# EAGLE board headstage-64-coax-adapter_rev1.2 - panel (EAGLE 9.5.1)
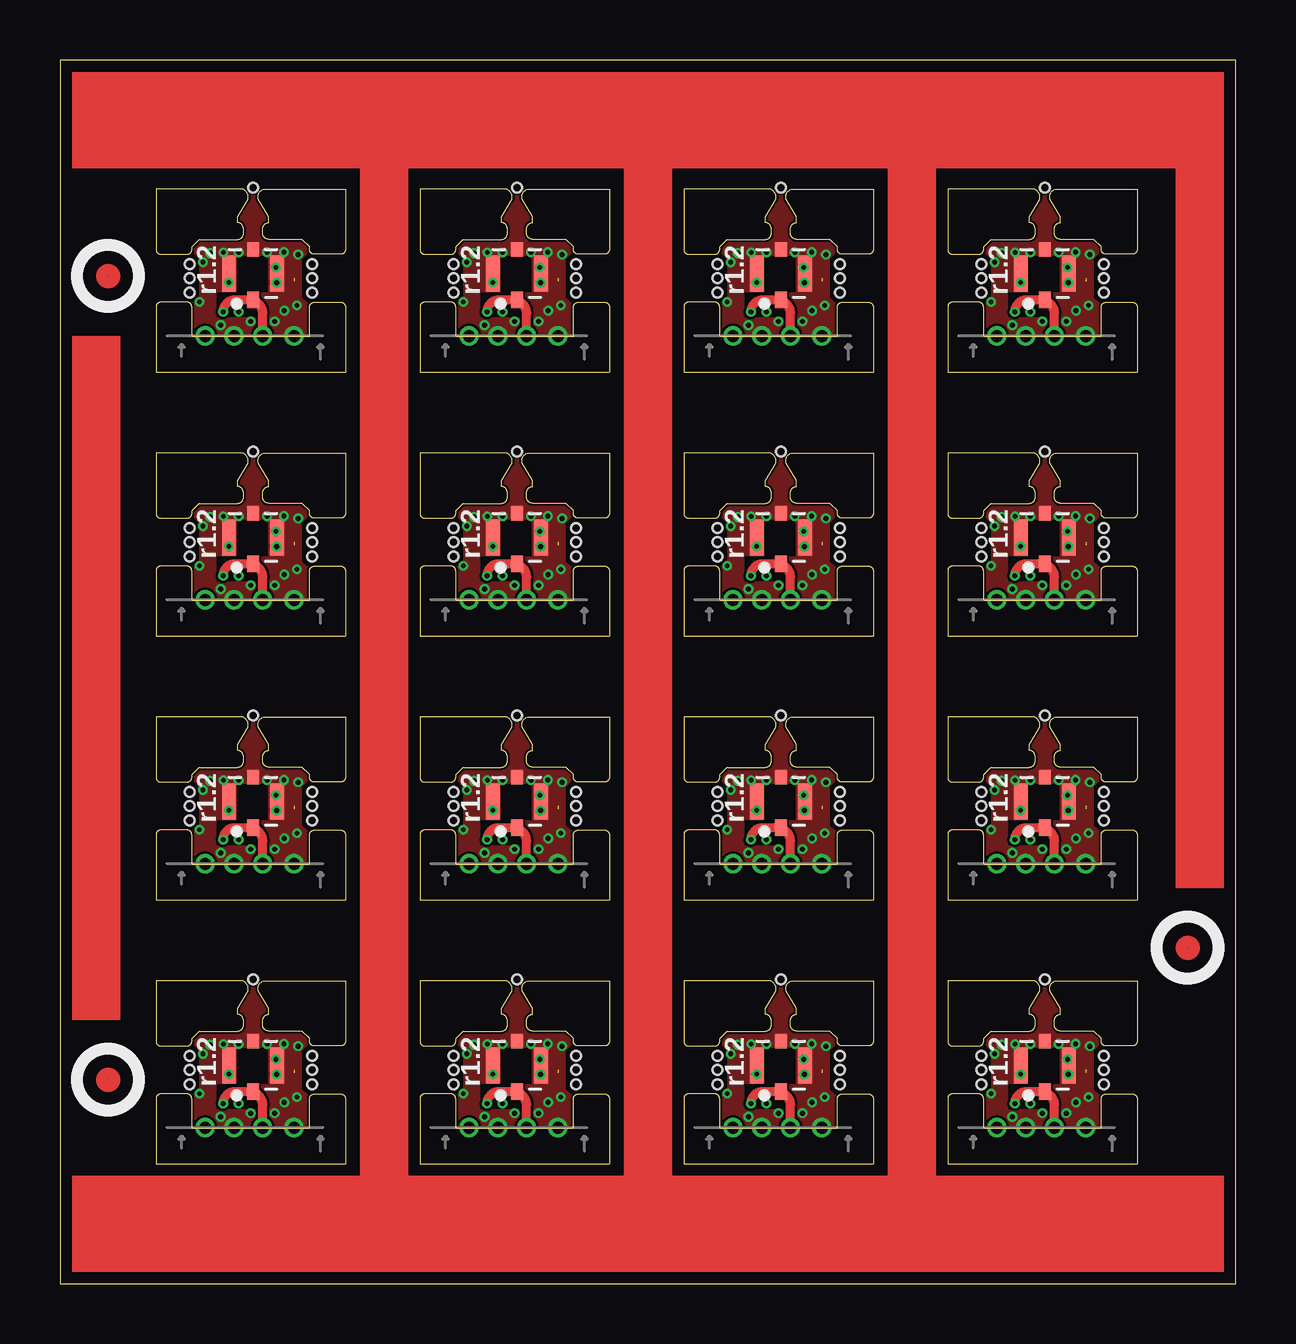
[diagram p0: board, top side]
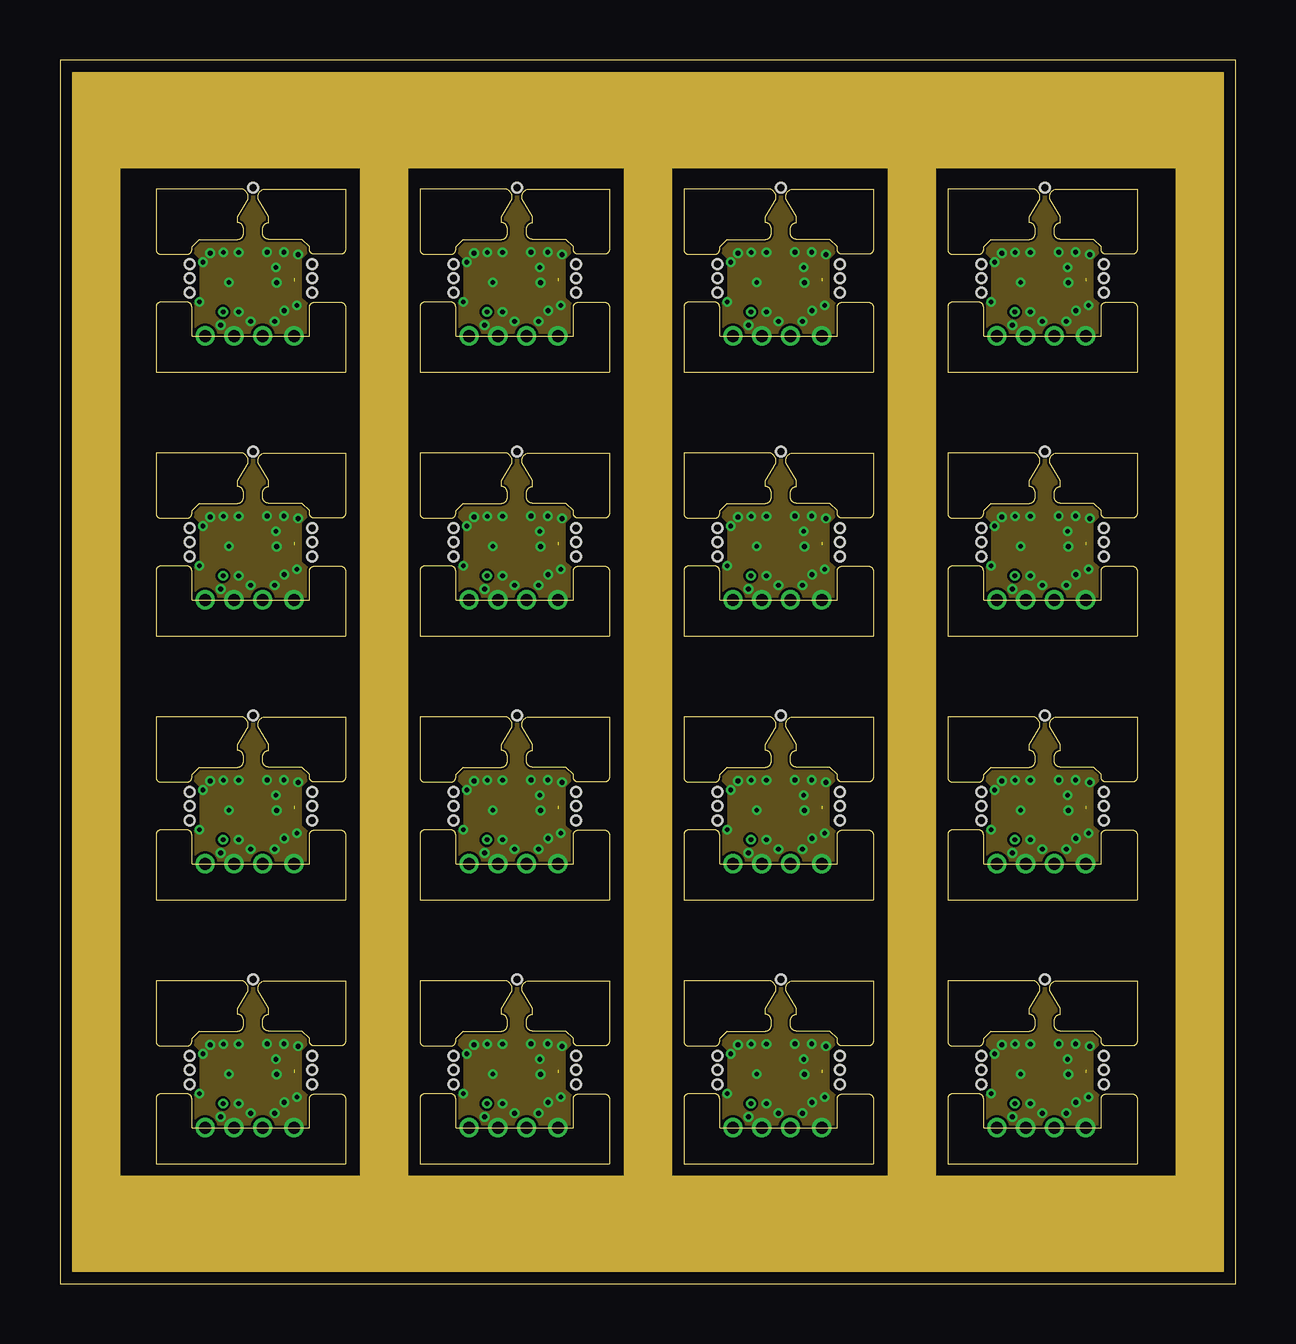
[diagram p1: board, inner layer Route2]
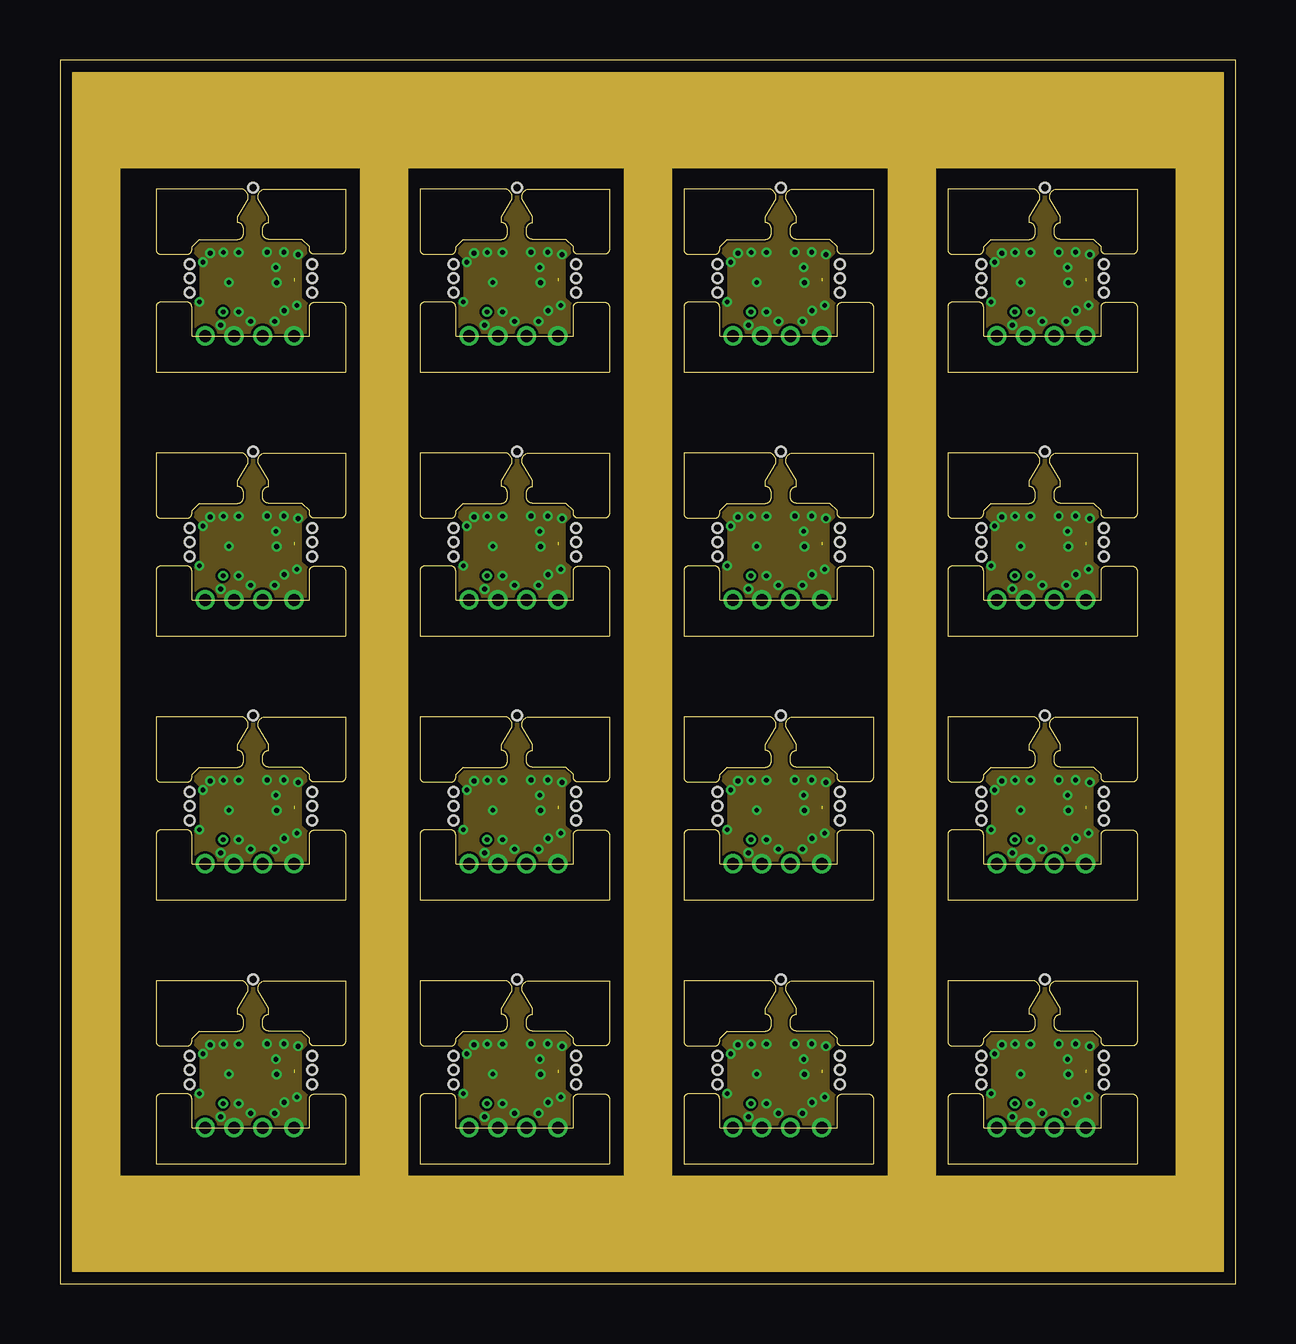
[diagram p2: board, inner layer Route15]
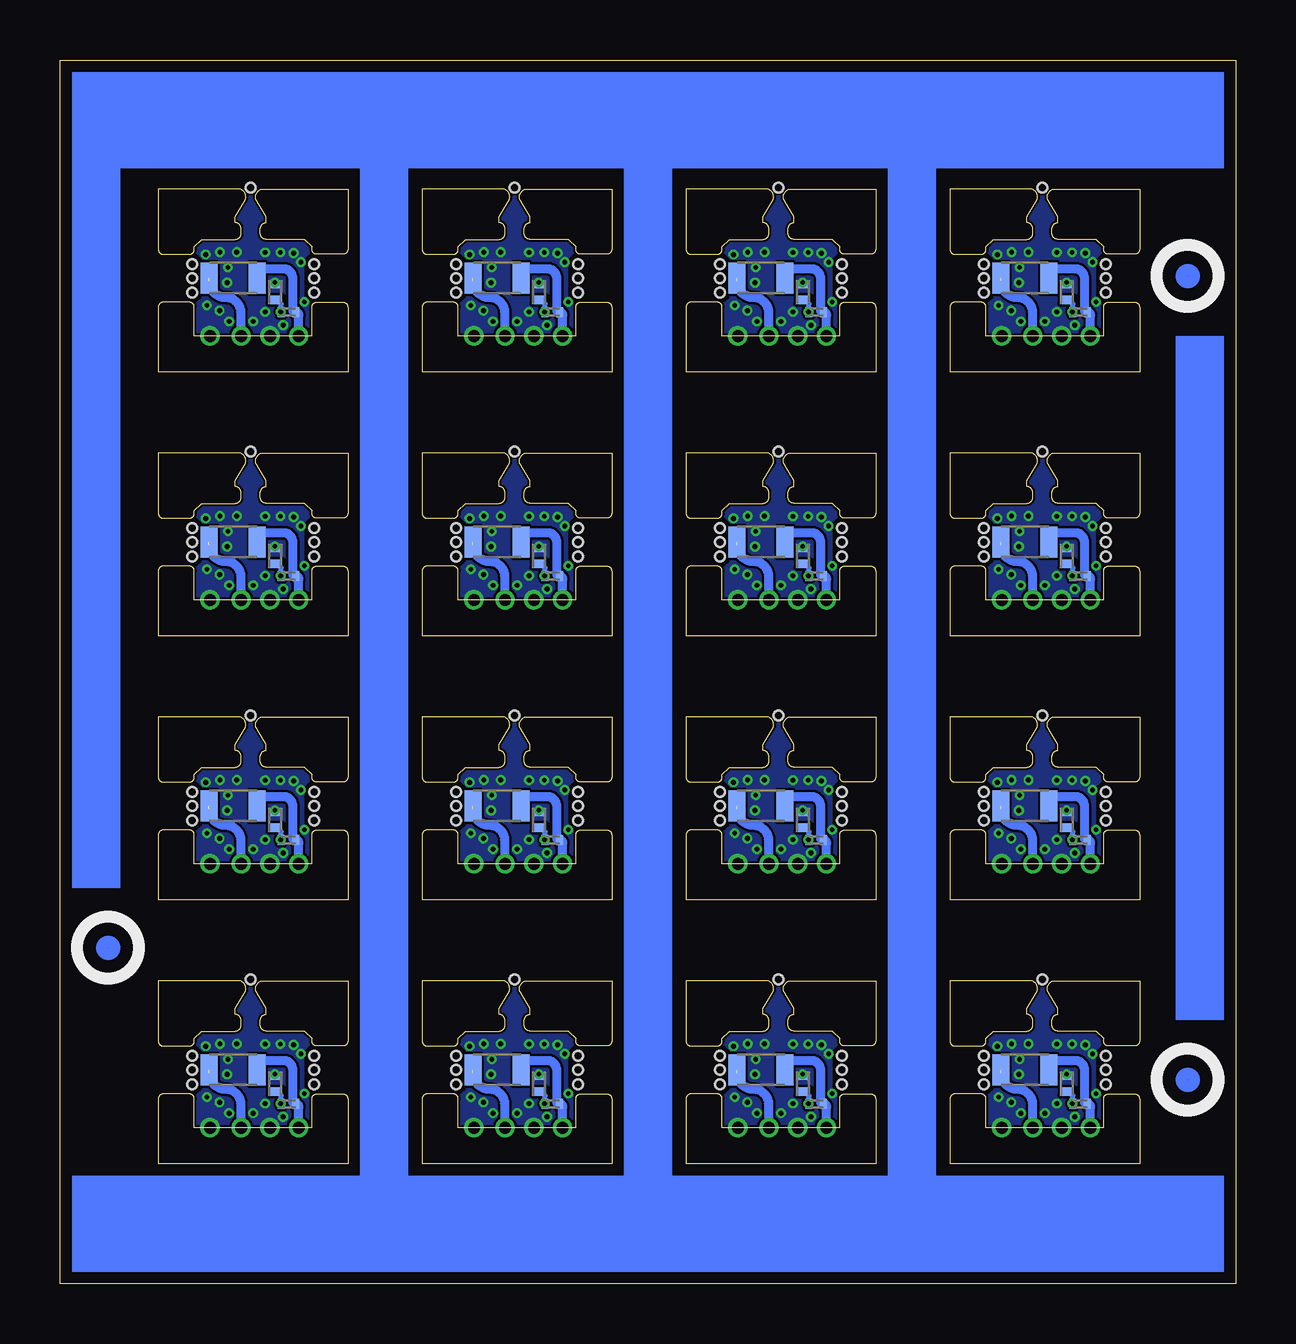
[diagram p3: board, bottom side, seen from below]

Size 49 x 51 mm. Coordinates in mm from the lower left corner, seen from the top.
Outline: 676 segments
Copper layers (1*2*15*16): Top 0.035mm / dielectric 0.2mm / Route2 0.0175mm / dielectric 0.3mm / Route15 0.0175mm / dielectric 0.2mm / Bottom 0.035mm
Design rules "seeed-studio-4-layer *": minimum track width 4mil, minimum drill 0.2mm, track to track 4mil, track to pad 4mil, pad to pad 4mil, via to via 4mil, smd to smd 0mil, copper to edge 0.1mm, drill to drill 10mil, minimum pad ring 6mil, minimum via ring 4mil, stop-mask expansion 4mil, vias tented up to drill 100mil, thermal gap 10mil
Holes 0.4 mm at 8.05,12.68 5.4,9.5 5.4,8.9 5.4,8.3 10.5,9.5 10.5,8.9 10.5,8.3 19.05,12.68 16.4,9.5 16.4,8.9 16.4,8.3 21.5,9.5 21.5,8.9 21.5,8.3 30.05,12.68 27.4,9.5 27.4,8.9 27.4,8.3 32.5,9.5 32.5,8.9 32.5,8.3 41.05,12.68 38.4,9.5 38.4,8.9 38.4,8.3 43.5,9.5 43.5,8.9 43.5,8.3 8.05,23.68 5.4,20.5 5.4,19.9 5.4,19.3 10.5,20.5 10.5,19.9 10.5,19.3 19.05,23.68 16.4,20.5 16.4,19.9 16.4,19.3 21.5,20.5 21.5,19.9 21.5,19.3 30.05,23.68 27.4,20.5 27.4,19.9 27.4,19.3 32.5,20.5 32.5,19.9 32.5,19.3 41.05,23.68 38.4,20.5 38.4,19.9 38.4,19.3 43.5,20.5 43.5,19.9 43.5,19.3 8.05,34.67 5.4,31.5 5.4,30.9 5.4,30.3 10.5,31.5 10.5,30.9 10.5,30.3 19.05,34.67 16.4,31.5 16.4,30.9 16.4,30.3 21.5,31.5 21.5,30.9 21.5,30.3 30.05,34.67 27.4,31.5 27.4,30.9 27.4,30.3 32.5,31.5 32.5,30.9 32.5,30.3 41.05,34.67 38.4,31.5 38.4,30.9 38.4,30.3 43.5,31.5 43.5,30.9 43.5,30.3 8.05,45.67 5.4,42.5 5.4,41.9 5.4,41.3 10.5,42.5 10.5,41.9 10.5,41.3 19.05,45.67 16.4,42.5 16.4,41.9 16.4,41.3 21.5,42.5 21.5,41.9 21.5,41.3 30.05,45.67 27.4,42.5 27.4,41.9 27.4,41.3 32.5,42.5 32.5,41.9 32.5,41.3 41.05,45.67 38.4,42.5 38.4,41.9 38.4,41.3 43.5,42.5 43.5,41.9 43.5,41.3

## Footprints (pad centres in the part's own frame; a part is rotated, then mirrored left to right if it is on the bottom)
0402T-DFN = smd 0.35 x 0.6: A -0.325,0; C 0.325,0
X_FL_R_SMT_1(02) = smd 0.5 x 0.7: P$1 0,-1.1 | smd 0.6 x 1.5: P$2 -1,0; P$4 1,0 | smd 0.5 x 0.6: P$3 0,1
HEADSTAGE64-DAUGHER-CARD-CASTELLATED = drill 0.5: 1 -2.4,0; 2 -1.2,0; 3 0,0; 4 1.3,0
0805T = smd 0.7 x 1.3: 1 -1,0; 2 1,0
0201T = smd 0.3 x 0.4: 1 -0.3,0; 2 0.3,0

## Placement (x,y rotation side)
D1  SESD0402X1UN-0020-090  [0402T-DFN]  7.03,8.33 270 bottom
D2  SESD0402X1UN-0020-090  [0402T-DFN]  18.03,8.33 270 bottom
D3  SESD0402X1UN-0020-090  [0402T-DFN]  29.03,8.33 270 bottom
D4  SESD0402X1UN-0020-090  [0402T-DFN]  40.03,8.33 270 bottom
D5  SESD0402X1UN-0020-090  [0402T-DFN]  7.03,19.33 270 bottom
D6  SESD0402X1UN-0020-090  [0402T-DFN]  18.03,19.33 270 bottom
D7  SESD0402X1UN-0020-090  [0402T-DFN]  29.03,19.33 270 bottom
D8  SESD0402X1UN-0020-090  [0402T-DFN]  40.03,19.33 270 bottom
D9  SESD0402X1UN-0020-090  [0402T-DFN]  7.03,30.33 270 bottom
D10  SESD0402X1UN-0020-090  [0402T-DFN]  18.03,30.33 270 bottom
D11  SESD0402X1UN-0020-090  [0402T-DFN]  29.03,30.33 270 bottom
D12  SESD0402X1UN-0020-090  [0402T-DFN]  40.03,30.33 270 bottom
D13  SESD0402X1UN-0020-090  [0402T-DFN]  7.03,41.33 270 bottom
D14  SESD0402X1UN-0020-090  [0402T-DFN]  18.03,41.33 270 bottom
D15  SESD0402X1UN-0020-090  [0402T-DFN]  29.03,41.33 270 bottom
D16  SESD0402X1UN-0020-090  [0402T-DFN]  40.03,41.33 270 bottom
E$1  [FIDUCIAL]  47,14 0 top
E$2  [FIDUCIAL]  2,42 0 top
E$3  [FIDUCIAL]  2,42 0 bottom
E$4  [FIDUCIAL]  2,8.5 0 top
E$5  [FIDUCIAL]  2,8.5 0 bottom
E$6  [FIDUCIAL]  47,14 0 bottom
J1  X.FL-R-SMT-1(02)  [X_FL_R_SMT_1(02)]  8.05,9.1 0 top
J2  [HEADSTAGE64-DAUGHER-CARD-CASTELLATED]  8.45,6.5 0 top
J3  X.FL-R-SMT-1(02)  [X_FL_R_SMT_1(02)]  19.05,9.1 0 top
J4  [HEADSTAGE64-DAUGHER-CARD-CASTELLATED]  19.45,6.5 0 top
J5  X.FL-R-SMT-1(02)  [X_FL_R_SMT_1(02)]  30.05,9.1 0 top
J6  [HEADSTAGE64-DAUGHER-CARD-CASTELLATED]  30.45,6.5 0 top
J7  X.FL-R-SMT-1(02)  [X_FL_R_SMT_1(02)]  41.05,9.1 0 top
J8  [HEADSTAGE64-DAUGHER-CARD-CASTELLATED]  41.45,6.5 0 top
J9  X.FL-R-SMT-1(02)  [X_FL_R_SMT_1(02)]  8.05,20.1 0 top
J10  [HEADSTAGE64-DAUGHER-CARD-CASTELLATED]  8.45,17.5 0 top
J11  X.FL-R-SMT-1(02)  [X_FL_R_SMT_1(02)]  19.05,20.1 0 top
J12  [HEADSTAGE64-DAUGHER-CARD-CASTELLATED]  19.45,17.5 0 top
J13  X.FL-R-SMT-1(02)  [X_FL_R_SMT_1(02)]  30.05,20.1 0 top
J14  [HEADSTAGE64-DAUGHER-CARD-CASTELLATED]  30.45,17.5 0 top
J15  X.FL-R-SMT-1(02)  [X_FL_R_SMT_1(02)]  41.05,20.1 0 top
J16  [HEADSTAGE64-DAUGHER-CARD-CASTELLATED]  41.45,17.5 0 top
J17  X.FL-R-SMT-1(02)  [X_FL_R_SMT_1(02)]  8.05,31.1 0 top
J18  [HEADSTAGE64-DAUGHER-CARD-CASTELLATED]  8.45,28.5 0 top
J19  X.FL-R-SMT-1(02)  [X_FL_R_SMT_1(02)]  19.05,31.1 0 top
J20  [HEADSTAGE64-DAUGHER-CARD-CASTELLATED]  19.45,28.5 0 top
J21  X.FL-R-SMT-1(02)  [X_FL_R_SMT_1(02)]  30.05,31.1 0 top
J22  [HEADSTAGE64-DAUGHER-CARD-CASTELLATED]  30.45,28.5 0 top
J23  X.FL-R-SMT-1(02)  [X_FL_R_SMT_1(02)]  41.05,31.1 0 top
J24  [HEADSTAGE64-DAUGHER-CARD-CASTELLATED]  41.45,28.5 0 top
J25  X.FL-R-SMT-1(02)  [X_FL_R_SMT_1(02)]  8.05,42.1 0 top
J26  [HEADSTAGE64-DAUGHER-CARD-CASTELLATED]  8.45,39.5 0 top
J27  X.FL-R-SMT-1(02)  [X_FL_R_SMT_1(02)]  19.05,42.1 0 top
J28  [HEADSTAGE64-DAUGHER-CARD-CASTELLATED]  19.45,39.5 0 top
J29  X.FL-R-SMT-1(02)  [X_FL_R_SMT_1(02)]  30.05,42.1 0 top
J30  [HEADSTAGE64-DAUGHER-CARD-CASTELLATED]  30.45,39.5 0 top
J31  X.FL-R-SMT-1(02)  [X_FL_R_SMT_1(02)]  41.05,42.1 0 top
J32  [HEADSTAGE64-DAUGHER-CARD-CASTELLATED]  41.45,39.5 0 top
L1  CIG21L4R7MNE  [0805T]  8.78,8.91 0 bottom
L2  CIG21L4R7MNE  [0805T]  19.78,8.91 0 bottom
L3  CIG21L4R7MNE  [0805T]  30.78,8.91 0 bottom
L4  CIG21L4R7MNE  [0805T]  41.78,8.91 0 bottom
L5  CIG21L4R7MNE  [0805T]  8.78,19.91 0 bottom
L6  CIG21L4R7MNE  [0805T]  19.78,19.91 0 bottom
L7  CIG21L4R7MNE  [0805T]  30.78,19.91 0 bottom
L8  CIG21L4R7MNE  [0805T]  41.78,19.91 0 bottom
L9  CIG21L4R7MNE  [0805T]  8.78,30.91 0 bottom
L10  CIG21L4R7MNE  [0805T]  19.78,30.91 0 bottom
L11  CIG21L4R7MNE  [0805T]  30.78,30.91 0 bottom
L12  CIG21L4R7MNE  [0805T]  41.78,30.91 0 bottom
L13  CIG21L4R7MNE  [0805T]  8.78,41.91 0 bottom
L14  CIG21L4R7MNE  [0805T]  19.78,41.91 0 bottom
L15  CIG21L4R7MNE  [0805T]  30.78,41.91 0 bottom
L16  CIG21L4R7MNE  [0805T]  41.78,41.91 0 bottom
R1  1k  [0201T]  17.48,7.49 0 bottom
R2  1k  [0201T]  28.48,7.49 0 bottom
R3  1k  [0201T]  6.48,7.49 0 bottom
R4  1k  [0201T]  39.48,7.49 0 bottom
R5  1k  [0201T]  6.48,18.49 0 bottom
R6  1k  [0201T]  17.48,18.49 0 bottom
R7  1k  [0201T]  28.48,18.49 0 bottom
R8  1k  [0201T]  39.48,18.49 0 bottom
R9  1k  [0201T]  6.48,29.49 0 bottom
R10  1k  [0201T]  17.48,29.49 0 bottom
R11  1k  [0201T]  28.48,29.49 0 bottom
R12  1k  [0201T]  39.48,29.49 0 bottom
R13  1k  [0201T]  6.48,40.49 0 bottom
R14  1k  [0201T]  17.48,40.49 0 bottom
R15  1k  [0201T]  28.48,40.49 0 bottom
R16  1k  [0201T]  39.48,40.49 0 bottom

## Library data of the parts
D1-D16 J1-J32 L1-L16 R1-R16 = jonnew
E$1-E$6 = fiducial

## Nets
_SIGOUT1: D1.C J1.P$1 J2.3 L1.1 R3.1
_SIGOUT2: D2.C J3.P$1 J4.3 L2.1 R1.1
_SIGOUT3: D3.C J5.P$1 J6.3 L3.1 R2.1
_SIGOUT4: D4.C J7.P$1 J8.3 L4.1 R4.1
_SIGOUT5: D5.C J9.P$1 J10.3 L5.1 R5.1
_SIGOUT6: D6.C J11.P$1 J12.3 L6.1 R6.1
_SIGOUT7: D7.C J13.P$1 J14.3 L7.1 R7.1
_SIGOUT8: D8.C J15.P$1 J16.3 L8.1 R8.1
_SIGOUT9: D9.C J17.P$1 J18.3 L9.1 R9.1
_SIGOUT10: D10.C J19.P$1 J20.3 L10.1 R10.1
_SIGOUT11: D11.C J21.P$1 J22.3 L11.1 R11.1
_SIGOUT12: D12.C J23.P$1 J24.3 L12.1 R12.1
_SIGOUT13: D13.C J25.P$1 J26.3 L13.1 R13.1
_SIGOUT14: D14.C J27.P$1 J28.3 L14.1 R14.1
_SIGOUT15: D15.C J29.P$1 J30.3 L15.1 R15.1
_SIGOUT16: D16.C J31.P$1 J32.3 L16.1 R16.1
GND: D1.A J1.P$2 J1.P$3 J1.P$4 J2.2 J2.4
GND2: D2.A J3.P$2 J3.P$3 J3.P$4 J4.2 J4.4
GND10: D3.A J5.P$2 J5.P$3 J5.P$4 J6.2 J6.4
GND12: D4.A J7.P$2 J7.P$3 J7.P$4 J8.2 J8.4
GND14: D5.A J9.P$2 J9.P$3 J9.P$4 J10.2 J10.4
GND16: D6.A J11.P$2 J11.P$3 J11.P$4 J12.2 J12.4
GND18: D7.A J13.P$2 J13.P$3 J13.P$4 J14.2 J14.4
GND20: D8.A J15.P$2 J15.P$3 J15.P$4 J16.2 J16.4
GND22: D9.A J17.P$2 J17.P$3 J17.P$4 J18.2 J18.4
GND24: D10.A J19.P$2 J19.P$3 J19.P$4 J20.2 J20.4
GND26: D11.A J21.P$2 J21.P$3 J21.P$4 J22.2 J22.4
GND28: D12.A J23.P$2 J23.P$3 J23.P$4 J24.2 J24.4
GND30: D13.A J25.P$2 J25.P$3 J25.P$4 J26.2 J26.4
GND32: D14.A J27.P$2 J27.P$3 J27.P$4 J28.2 J28.4
GND34: D15.A J29.P$2 J29.P$3 J29.P$4 J30.2 J30.4
GND36: D16.A J31.P$2 J31.P$3 J31.P$4 J32.2 J32.4
N$1: J4.1 L2.2 R1.2
N$3: J6.1 L3.2 R2.2
N$5: J8.1 L4.2 R4.2
N$7: J10.1 L5.2 R5.2
N$9: J12.1 L6.2 R6.2
N$11: J14.1 L7.2 R7.2
N$13: J16.1 L8.2 R8.2
N$15: J18.1 L9.2 R9.2
N$17: J20.1 L10.2 R10.2
N$19: J22.1 L11.2 R11.2
N$21: J24.1 L12.2 R12.2
N$23: J26.1 L13.2 R13.2
N$25: J28.1 L14.2 R14.2
N$27: J30.1 L15.2 R15.2
N$29: J32.1 L16.2 R16.2
N$48: J2.1 L1.2 R3.2

## Tracks (layer width: path | path; a pad name or v marks a point on that pad's centre or on a via)
_SIGOUT1  (via drill 0.2)  (1 unrouted)
  Top 0.37: J2.3 8.45,7.45 arc90 7.9,8 J1.P$1 7.3,8 arc90 v6.8,7.5
  Bottom 0.127: R3.1 R3.1 arc90 v6.8,7.5
  Bottom 0.2: R3.1 6.78,7.83 D1.C
  Bottom 0.37: J2.3 8.45,7.45 arc-90 9.1,8.1 arc90 9.78,8.78
_SIGOUT2  (via drill 0.2)  (1 unrouted)
  Top 0.37: J4.3 19.45,7.45 arc90 18.9,8 J3.P$1 18.3,8 arc90 v17.8,7.5
  Bottom 0.127: R1.1 R1.1 arc90 v17.8,7.5
  Bottom 0.2: R1.1 17.78,7.83 D2.C
  Bottom 0.37: J4.3 19.45,7.45 arc-90 20.1,8.1 arc90 20.78,8.78
_SIGOUT3  (via drill 0.2)  (1 unrouted)
  Top 0.37: J6.3 30.45,7.45 arc90 29.9,8 J5.P$1 29.3,8 arc90 v28.8,7.5
  Bottom 0.127: R2.1 R2.1 arc90 v28.8,7.5
  Bottom 0.2: R2.1 28.78,7.83 D3.C
  Bottom 0.37: J6.3 30.45,7.45 arc-90 31.1,8.1 arc90 31.78,8.78
_SIGOUT4  (via drill 0.2)  (1 unrouted)
  Top 0.37: J8.3 41.45,7.45 arc90 40.9,8 J7.P$1 40.3,8 arc90 v39.8,7.5
  Bottom 0.127: R4.1 R4.1 arc90 v39.8,7.5
  Bottom 0.2: R4.1 39.78,7.83 D4.C
  Bottom 0.37: J8.3 41.45,7.45 arc-90 42.1,8.1 arc90 42.78,8.78
_SIGOUT5  (via drill 0.2)  (1 unrouted)
  Top 0.37: J10.3 8.45,18.45 arc90 7.9,19 J9.P$1 7.3,19 arc90 v6.8,18.5
  Bottom 0.127: R5.1 R5.1 arc90 v6.8,18.5
  Bottom 0.2: R5.1 6.78,18.84 D5.C
  Bottom 0.37: J10.3 8.45,18.45 arc-90 9.1,19.1 arc90 9.78,19.78
_SIGOUT6  (via drill 0.2)  (1 unrouted)
  Top 0.37: J12.3 19.45,18.45 arc90 18.9,19 J11.P$1 18.3,19 arc90 v17.8,18.5
  Bottom 0.127: R6.1 R6.1 arc90 v17.8,18.5
  Bottom 0.2: R6.1 17.78,18.84 D6.C
  Bottom 0.37: J12.3 19.45,18.45 arc-90 20.1,19.1 arc90 20.78,19.78
_SIGOUT7  (via drill 0.2)  (1 unrouted)
  Top 0.37: J14.3 30.45,18.45 arc90 29.9,19 J13.P$1 29.3,19 arc90 v28.8,18.5
  Bottom 0.127: R7.1 R7.1 arc90 v28.8,18.5
  Bottom 0.2: R7.1 28.78,18.84 D7.C
  Bottom 0.37: J14.3 30.45,18.45 arc-90 31.1,19.1 arc90 31.78,19.78
_SIGOUT8  (via drill 0.2)  (1 unrouted)
  Top 0.37: J16.3 41.45,18.45 arc90 40.9,19 J15.P$1 40.3,19 arc90 v39.8,18.5
  Bottom 0.127: R8.1 R8.1 arc90 v39.8,18.5
  Bottom 0.2: R8.1 39.78,18.84 D8.C
  Bottom 0.37: J16.3 41.45,18.45 arc-90 42.1,19.1 arc90 42.78,19.78
_SIGOUT9  (via drill 0.2)  (1 unrouted)
  Top 0.37: J18.3 8.45,29.45 arc90 7.9,30 J17.P$1 7.3,30 arc90 v6.8,29.5
  Bottom 0.127: R9.1 R9.1 arc90 v6.8,29.5
  Bottom 0.2: R9.1 6.78,29.84 D9.C
  Bottom 0.37: J18.3 8.45,29.45 arc-90 9.1,30.1 arc90 9.78,30.78
_SIGOUT10  (via drill 0.2)  (1 unrouted)
  Top 0.37: J20.3 19.45,29.45 arc90 18.9,30 J19.P$1 18.3,30 arc90 v17.8,29.5
  Bottom 0.127: R10.1 R10.1 arc90 v17.8,29.5
  Bottom 0.2: R10.1 17.78,29.84 D10.C
  Bottom 0.37: J20.3 19.45,29.45 arc-90 20.1,30.1 arc90 20.78,30.78
_SIGOUT11  (via drill 0.2)  (1 unrouted)
  Top 0.37: J22.3 30.45,29.45 arc90 29.9,30 J21.P$1 29.3,30 arc90 v28.8,29.5
  Bottom 0.127: R11.1 R11.1 arc90 v28.8,29.5
  Bottom 0.2: R11.1 28.78,29.84 D11.C
  Bottom 0.37: J22.3 30.45,29.45 arc-90 31.1,30.1 arc90 31.78,30.78
_SIGOUT12  (via drill 0.2)  (1 unrouted)
  Top 0.37: J24.3 41.45,29.45 arc90 40.9,30 J23.P$1 40.3,30 arc90 v39.8,29.5
  Bottom 0.127: R12.1 R12.1 arc90 v39.8,29.5
  Bottom 0.2: R12.1 39.78,29.84 D12.C
  Bottom 0.37: J24.3 41.45,29.45 arc-90 42.1,30.1 arc90 42.78,30.78
_SIGOUT13  (via drill 0.2)  (1 unrouted)
  Top 0.37: J26.3 8.45,40.45 arc90 7.9,41 J25.P$1 7.3,41 arc90 v6.8,40.5
  Bottom 0.127: R13.1 R13.1 arc90 v6.8,40.5
  Bottom 0.2: R13.1 6.78,40.84 D13.C
  Bottom 0.37: J26.3 8.45,40.45 arc-90 9.1,41.1 arc90 9.78,41.78
_SIGOUT14  (via drill 0.2)  (1 unrouted)
  Top 0.37: J28.3 19.45,40.45 arc90 18.9,41 J27.P$1 18.3,41 arc90 v17.8,40.5
  Bottom 0.127: R14.1 R14.1 arc90 v17.8,40.5
  Bottom 0.2: R14.1 17.78,40.84 D14.C
  Bottom 0.37: J28.3 19.45,40.45 arc-90 20.1,41.1 arc90 20.78,41.78
_SIGOUT15  (via drill 0.2)  (1 unrouted)
  Top 0.37: J30.3 30.45,40.45 arc90 29.9,41 J29.P$1 29.3,41 arc90 v28.8,40.5
  Bottom 0.127: R15.1 R15.1 arc90 v28.8,40.5
  Bottom 0.2: R15.1 28.78,40.84 D15.C
  Bottom 0.37: J30.3 30.45,40.45 arc-90 31.1,41.1 arc90 31.78,41.78
_SIGOUT16  (via drill 0.2)  (1 unrouted)
  Top 0.37: J32.3 41.45,40.45 arc90 40.9,41 J31.P$1 40.3,41 arc90 v39.8,40.5
  Bottom 0.127: R16.1 R16.1 arc90 v39.8,40.5
  Bottom 0.2: R16.1 39.78,40.84 D16.C
  Bottom 0.37: J32.3 41.45,40.45 arc-90 42.1,41.1 arc90 42.78,41.78
C1
  cutout Top: 5.6,9.9 5.8,9.7 5.8,8.1 5.6,7.9 5.3,7.9 5.3,9.9
  cutout Route2: 5.6,9.9 5.8,9.7 5.8,8.1 5.6,7.9 5.3,7.9 5.3,9.9
  cutout Route15: 5.6,9.9 5.8,9.7 5.8,8.1 5.6,7.9 5.3,7.9 5.3,9.9
  cutout Bottom: 5.6,9.9 5.8,9.7 5.8,8.1 5.6,7.9 5.3,7.9 5.3,9.9
C2
  cutout Route2: 10.3,9.9 10.1,9.7 10.1,8.1 10.3,7.9 10.6,7.9 10.6,9.9
C3
  cutout Route15: 10.3,9.9 10.1,9.7 10.1,8.1 10.3,7.9 10.6,7.9 10.6,9.9
C4
  cutout Bottom: 10.3,9.9 10.1,9.7 10.1,8.1 10.3,7.9 10.6,7.9 10.6,9.9
C5
  cutout Top: 10.3,9.9 10.1,9.7 10.1,8.1 10.3,7.9 10.6,7.9 10.6,9.9
C6
  cutout Top: 16.6,9.9 16.8,9.7 16.8,8.1 16.6,7.9 16.3,7.9 16.3,9.9
  cutout Route2: 16.6,9.9 16.8,9.7 16.8,8.1 16.6,7.9 16.3,7.9 16.3,9.9
  cutout Route15: 16.6,9.9 16.8,9.7 16.8,8.1 16.6,7.9 16.3,7.9 16.3,9.9
  cutout Bottom: 16.6,9.9 16.8,9.7 16.8,8.1 16.6,7.9 16.3,7.9 16.3,9.9
C7
  cutout Route2: 21.3,9.9 21.1,9.7 21.1,8.1 21.3,7.9 21.6,7.9 21.6,9.9
C8
  cutout Route15: 21.3,9.9 21.1,9.7 21.1,8.1 21.3,7.9 21.6,7.9 21.6,9.9
C9
  cutout Bottom: 21.3,9.9 21.1,9.7 21.1,8.1 21.3,7.9 21.6,7.9 21.6,9.9
C10
  cutout Top: 21.3,9.9 21.1,9.7 21.1,8.1 21.3,7.9 21.6,7.9 21.6,9.9
C11
  cutout Top: 27.6,9.9 27.8,9.7 27.8,8.1 27.6,7.9 27.3,7.9 27.3,9.9
  cutout Route2: 27.6,9.9 27.8,9.7 27.8,8.1 27.6,7.9 27.3,7.9 27.3,9.9
  cutout Route15: 27.6,9.9 27.8,9.7 27.8,8.1 27.6,7.9 27.3,7.9 27.3,9.9
  cutout Bottom: 27.6,9.9 27.8,9.7 27.8,8.1 27.6,7.9 27.3,7.9 27.3,9.9
C12
  cutout Route2: 32.3,9.9 32.1,9.7 32.1,8.1 32.3,7.9 32.6,7.9 32.6,9.9
C13
  cutout Route15: 32.3,9.9 32.1,9.7 32.1,8.1 32.3,7.9 32.6,7.9 32.6,9.9
C14
  cutout Bottom: 32.3,9.9 32.1,9.7 32.1,8.1 32.3,7.9 32.6,7.9 32.6,9.9
C15
  cutout Top: 32.3,9.9 32.1,9.7 32.1,8.1 32.3,7.9 32.6,7.9 32.6,9.9
C16
  cutout Top: 38.6,9.9 38.8,9.7 38.8,8.1 38.6,7.9 38.3,7.9 38.3,9.9
  cutout Route2: 38.6,9.9 38.8,9.7 38.8,8.1 38.6,7.9 38.3,7.9 38.3,9.9
  cutout Route15: 38.6,9.9 38.8,9.7 38.8,8.1 38.6,7.9 38.3,7.9 38.3,9.9
  cutout Bottom: 38.6,9.9 38.8,9.7 38.8,8.1 38.6,7.9 38.3,7.9 38.3,9.9
C17
  cutout Route2: 43.3,9.9 43.1,9.7 43.1,8.1 43.3,7.9 43.6,7.9 43.6,9.9
C18
  cutout Route15: 43.3,9.9 43.1,9.7 43.1,8.1 43.3,7.9 43.6,7.9 43.6,9.9
C19
  cutout Bottom: 43.3,9.9 43.1,9.7 43.1,8.1 43.3,7.9 43.6,7.9 43.6,9.9
C20
  cutout Top: 43.3,9.9 43.1,9.7 43.1,8.1 43.3,7.9 43.6,7.9 43.6,9.9
C21
  cutout Top: 5.6,20.9 5.8,20.7 5.8,19.1 5.6,18.9 5.3,18.9 5.3,20.9
  cutout Route2: 5.6,20.9 5.8,20.7 5.8,19.1 5.6,18.9 5.3,18.9 5.3,20.9
  cutout Route15: 5.6,20.9 5.8,20.7 5.8,19.1 5.6,18.9 5.3,18.9 5.3,20.9
  cutout Bottom: 5.6,20.9 5.8,20.7 5.8,19.1 5.6,18.9 5.3,18.9 5.3,20.9
C22
  cutout Route2: 10.3,20.9 10.1,20.7 10.1,19.1 10.3,18.9 10.6,18.9 10.6,20.9
C23
  cutout Route15: 10.3,20.9 10.1,20.7 10.1,19.1 10.3,18.9 10.6,18.9 10.6,20.9
C24
  cutout Bottom: 10.3,20.9 10.1,20.7 10.1,19.1 10.3,18.9 10.6,18.9 10.6,20.9
C25
  cutout Top: 10.3,20.9 10.1,20.7 10.1,19.1 10.3,18.9 10.6,18.9 10.6,20.9
C26
  cutout Top: 16.6,20.9 16.8,20.7 16.8,19.1 16.6,18.9 16.3,18.9 16.3,20.9
  cutout Route2: 16.6,20.9 16.8,20.7 16.8,19.1 16.6,18.9 16.3,18.9 16.3,20.9
  cutout Route15: 16.6,20.9 16.8,20.7 16.8,19.1 16.6,18.9 16.3,18.9 16.3,20.9
  cutout Bottom: 16.6,20.9 16.8,20.7 16.8,19.1 16.6,18.9 16.3,18.9 16.3,20.9
C27
  cutout Route2: 21.3,20.9 21.1,20.7 21.1,19.1 21.3,18.9 21.6,18.9 21.6,20.9
C28
  cutout Route15: 21.3,20.9 21.1,20.7 21.1,19.1 21.3,18.9 21.6,18.9 21.6,20.9
C29
  cutout Bottom: 21.3,20.9 21.1,20.7 21.1,19.1 21.3,18.9 21.6,18.9 21.6,20.9
C30
  cutout Top: 21.3,20.9 21.1,20.7 21.1,19.1 21.3,18.9 21.6,18.9 21.6,20.9
C31
  cutout Top: 27.6,20.9 27.8,20.7 27.8,19.1 27.6,18.9 27.3,18.9 27.3,20.9
  cutout Route2: 27.6,20.9 27.8,20.7 27.8,19.1 27.6,18.9 27.3,18.9 27.3,20.9
  cutout Route15: 27.6,20.9 27.8,20.7 27.8,19.1 27.6,18.9 27.3,18.9 27.3,20.9
  cutout Bottom: 27.6,20.9 27.8,20.7 27.8,19.1 27.6,18.9 27.3,18.9 27.3,20.9
C32
  cutout Route2: 32.3,20.9 32.1,20.7 32.1,19.1 32.3,18.9 32.6,18.9 32.6,20.9
C33
  cutout Route15: 32.3,20.9 32.1,20.7 32.1,19.1 32.3,18.9 32.6,18.9 32.6,20.9
C34
  cutout Bottom: 32.3,20.9 32.1,20.7 32.1,19.1 32.3,18.9 32.6,18.9 32.6,20.9
C35
  cutout Top: 32.3,20.9 32.1,20.7 32.1,19.1 32.3,18.9 32.6,18.9 32.6,20.9
C36
  cutout Top: 38.6,20.9 38.8,20.7 38.8,19.1 38.6,18.9 38.3,18.9 38.3,20.9
  cutout Route2: 38.6,20.9 38.8,20.7 38.8,19.1 38.6,18.9 38.3,18.9 38.3,20.9
  cutout Route15: 38.6,20.9 38.8,20.7 38.8,19.1 38.6,18.9 38.3,18.9 38.3,20.9
  cutout Bottom: 38.6,20.9 38.8,20.7 38.8,19.1 38.6,18.9 38.3,18.9 38.3,20.9
C37
  cutout Route2: 43.3,20.9 43.1,20.7 43.1,19.1 43.3,18.9 43.6,18.9 43.6,20.9
C38
  cutout Route15: 43.3,20.9 43.1,20.7 43.1,19.1 43.3,18.9 43.6,18.9 43.6,20.9
C39
  cutout Bottom: 43.3,20.9 43.1,20.7 43.1,19.1 43.3,18.9 43.6,18.9 43.6,20.9
C40
  cutout Top: 43.3,20.9 43.1,20.7 43.1,19.1 43.3,18.9 43.6,18.9 43.6,20.9
C41
  cutout Top: 5.6,31.9 5.8,31.7 5.8,30.1 5.6,29.9 5.3,29.9 5.3,31.9
  cutout Route2: 5.6,31.9 5.8,31.7 5.8,30.1 5.6,29.9 5.3,29.9 5.3,31.9
  cutout Route15: 5.6,31.9 5.8,31.7 5.8,30.1 5.6,29.9 5.3,29.9 5.3,31.9
  cutout Bottom: 5.6,31.9 5.8,31.7 5.8,30.1 5.6,29.9 5.3,29.9 5.3,31.9
C42
  cutout Route2: 10.3,31.9 10.1,31.7 10.1,30.1 10.3,29.9 10.6,29.9 10.6,31.9
C43
  cutout Route15: 10.3,31.9 10.1,31.7 10.1,30.1 10.3,29.9 10.6,29.9 10.6,31.9
C44
  cutout Bottom: 10.3,31.9 10.1,31.7 10.1,30.1 10.3,29.9 10.6,29.9 10.6,31.9
C45
  cutout Top: 10.3,31.9 10.1,31.7 10.1,30.1 10.3,29.9 10.6,29.9 10.6,31.9
C46
  cutout Top: 16.6,31.9 16.8,31.7 16.8,30.1 16.6,29.9 16.3,29.9 16.3,31.9
  cutout Route2: 16.6,31.9 16.8,31.7 16.8,30.1 16.6,29.9 16.3,29.9 16.3,31.9
  cutout Route15: 16.6,31.9 16.8,31.7 16.8,30.1 16.6,29.9 16.3,29.9 16.3,31.9
  cutout Bottom: 16.6,31.9 16.8,31.7 16.8,30.1 16.6,29.9 16.3,29.9 16.3,31.9
C47
  cutout Route2: 21.3,31.9 21.1,31.7 21.1,30.1 21.3,29.9 21.6,29.9 21.6,31.9
C48
  cutout Route15: 21.3,31.9 21.1,31.7 21.1,30.1 21.3,29.9 21.6,29.9 21.6,31.9
C49
  cutout Bottom: 21.3,31.9 21.1,31.7 21.1,30.1 21.3,29.9 21.6,29.9 21.6,31.9
C50
  cutout Top: 21.3,31.9 21.1,31.7 21.1,30.1 21.3,29.9 21.6,29.9 21.6,31.9
C51
  cutout Top: 27.6,31.9 27.8,31.7 27.8,30.1 27.6,29.9 27.3,29.9 27.3,31.9
  cutout Route2: 27.6,31.9 27.8,31.7 27.8,30.1 27.6,29.9 27.3,29.9 27.3,31.9
  cutout Route15: 27.6,31.9 27.8,31.7 27.8,30.1 27.6,29.9 27.3,29.9 27.3,31.9
  cutout Bottom: 27.6,31.9 27.8,31.7 27.8,30.1 27.6,29.9 27.3,29.9 27.3,31.9
C52
  cutout Route2: 32.3,31.9 32.1,31.7 32.1,30.1 32.3,29.9 32.6,29.9 32.6,31.9
C53
  cutout Route15: 32.3,31.9 32.1,31.7 32.1,30.1 32.3,29.9 32.6,29.9 32.6,31.9
C54
  cutout Bottom: 32.3,31.9 32.1,31.7 32.1,30.1 32.3,29.9 32.6,29.9 32.6,31.9
C55
  cutout Top: 32.3,31.9 32.1,31.7 32.1,30.1 32.3,29.9 32.6,29.9 32.6,31.9
C56
  cutout Top: 38.6,31.9 38.8,31.7 38.8,30.1 38.6,29.9 38.3,29.9 38.3,31.9
  cutout Route2: 38.6,31.9 38.8,31.7 38.8,30.1 38.6,29.9 38.3,29.9 38.3,31.9
  cutout Route15: 38.6,31.9 38.8,31.7 38.8,30.1 38.6,29.9 38.3,29.9 38.3,31.9
  cutout Bottom: 38.6,31.9 38.8,31.7 38.8,30.1 38.6,29.9 38.3,29.9 38.3,31.9
C57
  cutout Route2: 43.3,31.9 43.1,31.7 43.1,30.1 43.3,29.9 43.6,29.9 43.6,31.9
C58
  cutout Route15: 43.3,31.9 43.1,31.7 43.1,30.1 43.3,29.9 43.6,29.9 43.6,31.9
C59
  cutout Bottom: 43.3,31.9 43.1,31.7 43.1,30.1 43.3,29.9 43.6,29.9 43.6,31.9
C60
  cutout Top: 43.3,31.9 43.1,31.7 43.1,30.1 43.3,29.9 43.6,29.9 43.6,31.9
C61
  cutout Top: 5.6,42.9 5.8,42.7 5.8,41.1 5.6,40.9 5.3,40.9 5.3,42.9
  cutout Route2: 5.6,42.9 5.8,42.7 5.8,41.1 5.6,40.9 5.3,40.9 5.3,42.9
  cutout Route15: 5.6,42.9 5.8,42.7 5.8,41.1 5.6,40.9 5.3,40.9 5.3,42.9
  cutout Bottom: 5.6,42.9 5.8,42.7 5.8,41.1 5.6,40.9 5.3,40.9 5.3,42.9
C62
  cutout Route2: 10.3,42.9 10.1,42.7 10.1,41.1 10.3,40.9 10.6,40.9 10.6,42.9
C63
  cutout Route15: 10.3,42.9 10.1,42.7 10.1,41.1 10.3,40.9 10.6,40.9 10.6,42.9
C64
  cutout Bottom: 10.3,42.9 10.1,42.7 10.1,41.1 10.3,40.9 10.6,40.9 10.6,42.9
C65
  cutout Top: 10.3,42.9 10.1,42.7 10.1,41.1 10.3,40.9 10.6,40.9 10.6,42.9
C66
  cutout Top: 16.6,42.9 16.8,42.7 16.8,41.1 16.6,40.9 16.3,40.9 16.3,42.9
  cutout Route2: 16.6,42.9 16.8,42.7 16.8,41.1 16.6,40.9 16.3,40.9 16.3,42.9
  cutout Route15: 16.6,42.9 16.8,42.7 16.8,41.1 16.6,40.9 16.3,40.9 16.3,42.9
  cutout Bottom: 16.6,42.9 16.8,42.7 16.8,41.1 16.6,40.9 16.3,40.9 16.3,42.9
C67
  cutout Route2: 21.3,42.9 21.1,42.7 21.1,41.1 21.3,40.9 21.6,40.9 21.6,42.9
C68
  cutout Route15: 21.3,42.9 21.1,42.7 21.1,41.1 21.3,40.9 21.6,40.9 21.6,42.9
C69
  cutout Bottom: 21.3,42.9 21.1,42.7 21.1,41.1 21.3,40.9 21.6,40.9 21.6,42.9
C70
  cutout Top: 21.3,42.9 21.1,42.7 21.1,41.1 21.3,40.9 21.6,40.9 21.6,42.9
C71
  cutout Top: 27.6,42.9 27.8,42.7 27.8,41.1 27.6,40.9 27.3,40.9 27.3,42.9
  cutout Route2: 27.6,42.9 27.8,42.7 27.8,41.1 27.6,40.9 27.3,40.9 27.3,42.9
  cutout Route15: 27.6,42.9 27.8,42.7 27.8,41.1 27.6,40.9 27.3,40.9 27.3,42.9
  cutout Bottom: 27.6,42.9 27.8,42.7 27.8,41.1 27.6,40.9 27.3,40.9 27.3,42.9
C72
  cutout Route2: 32.3,42.9 32.1,42.7 32.1,41.1 32.3,40.9 32.6,40.9 32.6,42.9
C73
  cutout Route15: 32.3,42.9 32.1,42.7 32.1,41.1 32.3,40.9 32.6,40.9 32.6,42.9
C74
  cutout Bottom: 32.3,42.9 32.1,42.7 32.1,41.1 32.3,40.9 32.6,40.9 32.6,42.9
C75
  cutout Top: 32.3,42.9 32.1,42.7 32.1,41.1 32.3,40.9 32.6,40.9 32.6,42.9
C76
  cutout Top: 38.6,42.9 38.8,42.7 38.8,41.1 38.6,40.9 38.3,40.9 38.3,42.9
  cutout Route2: 38.6,42.9 38.8,42.7 38.8,41.1 38.6,40.9 38.3,40.9 38.3,42.9
  cutout Route15: 38.6,42.9 38.8,42.7 38.8,41.1 38.6,40.9 38.3,40.9 38.3,42.9
  cutout Bottom: 38.6,42.9 38.8,42.7 38.8,41.1 38.6,40.9 38.3,40.9 38.3,42.9
C77
  cutout Route2: 43.3,42.9 43.1,42.7 43.1,41.1 43.3,40.9 43.6,40.9 43.6,42.9
C78
  cutout Route15: 43.3,42.9 43.1,42.7 43.1,41.1 43.3,40.9 43.6,40.9 43.6,42.9
C79
  cutout Bottom: 43.3,42.9 43.1,42.7 43.1,41.1 43.3,40.9 43.6,40.9 43.6,42.9
C80
  cutout Top: 43.3,42.9 43.1,42.7 43.1,41.1 43.3,40.9 43.6,40.9 43.6,42.9
GND  (via drill 0.2)
  other vias: 7.04,8.73 7.95,7.1 5.81,7.92 9.03,8.72 7.45,9.98 6.81,9.98 9.35,7.55 8.95,7.1 9,9.35 8.63,9.99 5.96,9.57 6.26,9.95 9.93,9.89 7.45,7.5 6.7,6.95 9.88,7.77 9.33,9.99
  pour Bottom (isolate 0.02, rank 2, no thermals): 5.5,12.84 10.4,12.84 10.4,6.5 5.5,6.5
  pour Route15 (isolate 0.02, rank 2, no thermals): 5.5,12.84 10.4,12.84 10.4,6.5 5.5,6.5
  pour Top (isolate 0.02, rank 2, no thermals): 5.5,12.84 10.4,12.84 10.4,6.5 5.5,6.5
  pour Route15 (isolate 0.02, rank 2, no thermals): 5.5,12.84 10.4,12.84 10.4,6.5 5.5,6.5
  pour Route2 (isolate 0.02, rank 2, no thermals): 5.5,12.84 10.4,12.84 10.4,6.5 5.5,6.5
GND2  (via drill 0.2)
  other vias: 18.04,8.73 18.95,7.1 16.81,7.92 20.03,8.72 18.45,9.98 17.81,9.98 20.35,7.55 19.95,7.1 20,9.35 19.63,9.99 16.96,9.57 17.26,9.95 20.93,9.89 18.45,7.5 17.7,6.95 20.88,7.77 20.33,9.99
  pour Bottom (isolate 0.02, rank 2, no thermals): 16.5,12.84 21.4,12.84 21.4,6.5 16.5,6.5
  pour Route15 (isolate 0.02, rank 2, no thermals): 16.5,12.84 21.4,12.84 21.4,6.5 16.5,6.5
  pour Top (isolate 0.02, rank 2, no thermals): 16.5,12.84 21.4,12.84 21.4,6.5 16.5,6.5
  pour Route15 (isolate 0.02, rank 2, no thermals): 16.5,12.84 21.4,12.84 21.4,6.5 16.5,6.5
  pour Route2 (isolate 0.02, rank 2, no thermals): 16.5,12.84 21.4,12.84 21.4,6.5 16.5,6.5
GND10  (via drill 0.2)
  other vias: 29.04,8.73 29.95,7.1 27.81,7.92 31.03,8.72 29.45,9.98 28.81,9.98 31.35,7.55 30.95,7.1 31,9.35 30.63,9.99 27.96,9.57 28.26,9.95 31.93,9.89 29.45,7.5 28.7,6.95 31.88,7.77 31.33,9.99
  pour Bottom (isolate 0.02, rank 2, no thermals): 27.5,12.84 32.4,12.84 32.4,6.5 27.5,6.5
  pour Route15 (isolate 0.02, rank 2, no thermals): 27.5,12.84 32.4,12.84 32.4,6.5 27.5,6.5
  pour Top (isolate 0.02, rank 2, no thermals): 27.5,12.84 32.4,12.84 32.4,6.5 27.5,6.5
  pour Route15 (isolate 0.02, rank 2, no thermals): 27.5,12.84 32.4,12.84 32.4,6.5 27.5,6.5
  pour Route2 (isolate 0.02, rank 2, no thermals): 27.5,12.84 32.4,12.84 32.4,6.5 27.5,6.5
GND12  (via drill 0.2)
  other vias: 40.04,8.73 40.95,7.1 38.81,7.92 42.03,8.72 40.45,9.98 39.81,9.98 42.35,7.55 41.95,7.1 42,9.35 41.63,9.99 38.96,9.57 39.26,9.95 42.93,9.89 40.45,7.5 39.7,6.95 42.88,7.77 42.33,9.99
  pour Bottom (isolate 0.02, rank 2, no thermals): 38.5,12.84 43.4,12.84 43.4,6.5 38.5,6.5
  pour Route15 (isolate 0.02, rank 2, no thermals): 38.5,12.84 43.4,12.84 43.4,6.5 38.5,6.5
  pour Top (isolate 0.02, rank 2, no thermals): 38.5,12.84 43.4,12.84 43.4,6.5 38.5,6.5
  pour Route15 (isolate 0.02, rank 2, no thermals): 38.5,12.84 43.4,12.84 43.4,6.5 38.5,6.5
  pour Route2 (isolate 0.02, rank 2, no thermals): 38.5,12.84 43.4,12.84 43.4,6.5 38.5,6.5
GND14  (via drill 0.2)
  other vias: 7.04,19.73 7.95,18.1 5.81,18.92 9.03,19.72 7.45,20.98 6.81,20.98 9.35,18.55 8.95,18.1 9,20.35 8.63,20.99 5.96,20.57 6.26,20.95 9.93,20.89 7.45,18.5 6.7,17.95 9.88,18.77 9.33,20.99
  pour Bottom (isolate 0.02, rank 2, no thermals): 5.5,23.84 10.4,23.84 10.4,17.5 5.5,17.5
  pour Route15 (isolate 0.02, rank 2, no thermals): 5.5,23.84 10.4,23.84 10.4,17.5 5.5,17.5
  pour Top (isolate 0.02, rank 2, no thermals): 5.5,23.84 10.4,23.84 10.4,17.5 5.5,17.5
  pour Route15 (isolate 0.02, rank 2, no thermals): 5.5,23.84 10.4,23.84 10.4,17.5 5.5,17.5
  pour Route2 (isolate 0.02, rank 2, no thermals): 5.5,23.84 10.4,23.84 10.4,17.5 5.5,17.5
GND16  (via drill 0.2)
  other vias: 18.04,19.73 18.95,18.1 16.81,18.92 20.03,19.72 18.45,20.98 17.81,20.98 20.35,18.55 19.95,18.1 20,20.35 19.63,20.99 16.96,20.57 17.26,20.95 20.93,20.89 18.45,18.5 17.7,17.95 20.88,18.77 20.33,20.99
  pour Bottom (isolate 0.02, rank 2, no thermals): 16.5,23.84 21.4,23.84 21.4,17.5 16.5,17.5
  pour Route15 (isolate 0.02, rank 2, no thermals): 16.5,23.84 21.4,23.84 21.4,17.5 16.5,17.5
  pour Top (isolate 0.02, rank 2, no thermals): 16.5,23.84 21.4,23.84 21.4,17.5 16.5,17.5
  pour Route15 (isolate 0.02, rank 2, no thermals): 16.5,23.84 21.4,23.84 21.4,17.5 16.5,17.5
  pour Route2 (isolate 0.02, rank 2, no thermals): 16.5,23.84 21.4,23.84 21.4,17.5 16.5,17.5
GND18  (via drill 0.2)
  other vias: 29.04,19.73 29.95,18.1 27.81,18.92 31.03,19.72 29.45,20.98 28.81,20.98 31.35,18.55 30.95,18.1 31,20.35 30.63,20.99 27.96,20.57 28.26,20.95 31.93,20.89 29.45,18.5 28.7,17.95 31.88,18.77 31.33,20.99
  pour Bottom (isolate 0.02, rank 2, no thermals): 27.5,23.84 32.4,23.84 32.4,17.5 27.5,17.5
  pour Route15 (isolate 0.02, rank 2, no thermals): 27.5,23.84 32.4,23.84 32.4,17.5 27.5,17.5
  pour Top (isolate 0.02, rank 2, no thermals): 27.5,23.84 32.4,23.84 32.4,17.5 27.5,17.5
  pour Route15 (isolate 0.02, rank 2, no thermals): 27.5,23.84 32.4,23.84 32.4,17.5 27.5,17.5
  pour Route2 (isolate 0.02, rank 2, no thermals): 27.5,23.84 32.4,23.84 32.4,17.5 27.5,17.5
GND20  (via drill 0.2)
  other vias: 40.04,19.73 40.95,18.1 38.81,18.92 42.03,19.72 40.45,20.98 39.81,20.98 42.35,18.55 41.95,18.1 42,20.35 41.63,20.99 38.96,20.57 39.26,20.95 42.93,20.89 40.45,18.5 39.7,17.95 42.88,18.77 42.33,20.99
  pour Bottom (isolate 0.02, rank 2, no thermals): 38.5,23.84 43.4,23.84 43.4,17.5 38.5,17.5
  pour Route15 (isolate 0.02, rank 2, no thermals): 38.5,23.84 43.4,23.84 43.4,17.5 38.5,17.5
  pour Top (isolate 0.02, rank 2, no thermals): 38.5,23.84 43.4,23.84 43.4,17.5 38.5,17.5
  pour Route15 (isolate 0.02, rank 2, no thermals): 38.5,23.84 43.4,23.84 43.4,17.5 38.5,17.5
  pour Route2 (isolate 0.02, rank 2, no thermals): 38.5,23.84 43.4,23.84 43.4,17.5 38.5,17.5
GND22  (via drill 0.2)
  other vias: 7.04,30.73 7.95,29.1 5.81,29.92 9.03,30.72 7.45,31.98 6.81,31.98 9.35,29.55 8.95,29.1 9,31.35 8.63,31.99 5.96,31.57 6.26,31.95 9.93,31.89 7.45,29.5 6.7,28.95 9.88,29.77 9.33,31.99
  pour Bottom (isolate 0.02, rank 2, no thermals): 5.5,34.84 10.4,34.84 10.4,28.5 5.5,28.5
  pour Route15 (isolate 0.02, rank 2, no thermals): 5.5,34.84 10.4,34.84 10.4,28.5 5.5,28.5
  pour Top (isolate 0.02, rank 2, no thermals): 5.5,34.84 10.4,34.84 10.4,28.5 5.5,28.5
  pour Route15 (isolate 0.02, rank 2, no thermals): 5.5,34.84 10.4,34.84 10.4,28.5 5.5,28.5
  pour Route2 (isolate 0.02, rank 2, no thermals): 5.5,34.84 10.4,34.84 10.4,28.5 5.5,28.5
GND24  (via drill 0.2)
  other vias: 18.04,30.73 18.95,29.1 16.81,29.92 20.03,30.72 18.45,31.98 17.81,31.98 20.35,29.55 19.95,29.1 20,31.35 19.63,31.99 16.96,31.57 17.26,31.95 20.93,31.89 18.45,29.5 17.7,28.95 20.88,29.77 20.33,31.99
  pour Bottom (isolate 0.02, rank 2, no thermals): 16.5,34.84 21.4,34.84 21.4,28.5 16.5,28.5
  pour Route15 (isolate 0.02, rank 2, no thermals): 16.5,34.84 21.4,34.84 21.4,28.5 16.5,28.5
  pour Top (isolate 0.02, rank 2, no thermals): 16.5,34.84 21.4,34.84 21.4,28.5 16.5,28.5
  pour Route15 (isolate 0.02, rank 2, no thermals): 16.5,34.84 21.4,34.84 21.4,28.5 16.5,28.5
  pour Route2 (isolate 0.02, rank 2, no thermals): 16.5,34.84 21.4,34.84 21.4,28.5 16.5,28.5
GND26  (via drill 0.2)
  other vias: 29.04,30.73 29.95,29.1 27.81,29.92 31.03,30.72 29.45,31.98 28.81,31.98 31.35,29.55 30.95,29.1 31,31.35 30.63,31.99 27.96,31.57 28.26,31.95 31.93,31.89 29.45,29.5 28.7,28.95 31.88,29.77 31.33,31.99
  pour Bottom (isolate 0.02, rank 2, no thermals): 27.5,34.84 32.4,34.84 32.4,28.5 27.5,28.5
  pour Route15 (isolate 0.02, rank 2, no thermals): 27.5,34.84 32.4,34.84 32.4,28.5 27.5,28.5
  pour Top (isolate 0.02, rank 2, no thermals): 27.5,34.84 32.4,34.84 32.4,28.5 27.5,28.5
  pour Route15 (isolate 0.02, rank 2, no thermals): 27.5,34.84 32.4,34.84 32.4,28.5 27.5,28.5
  pour Route2 (isolate 0.02, rank 2, no thermals): 27.5,34.84 32.4,34.84 32.4,28.5 27.5,28.5
GND28  (via drill 0.2)
  other vias: 40.04,30.73 40.95,29.1 38.81,29.92 42.03,30.72 40.45,31.98 39.81,31.98 42.35,29.55 41.95,29.1 42,31.35 41.63,31.99 38.96,31.57 39.26,31.95 42.93,31.89 40.45,29.5 39.7,28.95 42.88,29.77 42.33,31.99
  pour Bottom (isolate 0.02, rank 2, no thermals): 38.5,34.84 43.4,34.84 43.4,28.5 38.5,28.5
  pour Route15 (isolate 0.02, rank 2, no thermals): 38.5,34.84 43.4,34.84 43.4,28.5 38.5,28.5
  pour Top (isolate 0.02, rank 2, no thermals): 38.5,34.84 43.4,34.84 43.4,28.5 38.5,28.5
  pour Route15 (isolate 0.02, rank 2, no thermals): 38.5,34.84 43.4,34.84 43.4,28.5 38.5,28.5
  pour Route2 (isolate 0.02, rank 2, no thermals): 38.5,34.84 43.4,34.84 43.4,28.5 38.5,28.5
GND30  (via drill 0.2)
  other vias: 7.04,41.73 7.95,40.1 5.81,40.92 9.03,41.72 7.45,42.98 6.81,42.98 9.35,40.55 8.95,40.1 9,42.35 8.63,42.99 5.96,42.57 6.26,42.95 9.93,42.89 7.45,40.5 6.7,39.95 9.88,40.77 9.33,42.99
  pour Bottom (isolate 0.02, rank 2, no thermals): 5.5,45.84 10.4,45.84 10.4,39.5 5.5,39.5
  pour Route15 (isolate 0.02, rank 2, no thermals): 5.5,45.84 10.4,45.84 10.4,39.5 5.5,39.5
  pour Top (isolate 0.02, rank 2, no thermals): 5.5,45.84 10.4,45.84 10.4,39.5 5.5,39.5
  pour Route15 (isolate 0.02, rank 2, no thermals): 5.5,45.84 10.4,45.84 10.4,39.5 5.5,39.5
  pour Route2 (isolate 0.02, rank 2, no thermals): 5.5,45.84 10.4,45.84 10.4,39.5 5.5,39.5
GND32  (via drill 0.2)
  other vias: 18.04,41.73 18.95,40.1 16.81,40.92 20.03,41.72 18.45,42.98 17.81,42.98 20.35,40.55 19.95,40.1 20,42.35 19.63,42.99 16.96,42.57 17.26,42.95 20.93,42.89 18.45,40.5 17.7,39.95 20.88,40.77 20.33,42.99
  pour Bottom (isolate 0.02, rank 2, no thermals): 16.5,45.84 21.4,45.84 21.4,39.5 16.5,39.5
  pour Route15 (isolate 0.02, rank 2, no thermals): 16.5,45.84 21.4,45.84 21.4,39.5 16.5,39.5
  pour Top (isolate 0.02, rank 2, no thermals): 16.5,45.84 21.4,45.84 21.4,39.5 16.5,39.5
  pour Route15 (isolate 0.02, rank 2, no thermals): 16.5,45.84 21.4,45.84 21.4,39.5 16.5,39.5
  pour Route2 (isolate 0.02, rank 2, no thermals): 16.5,45.84 21.4,45.84 21.4,39.5 16.5,39.5
GND34  (via drill 0.2)
  other vias: 29.04,41.73 29.95,40.1 27.81,40.92 31.03,41.72 29.45,42.98 28.81,42.98 31.35,40.55 30.95,40.1 31,42.35 30.63,42.99 27.96,42.57 28.26,42.95 31.93,42.89 29.45,40.5 28.7,39.95 31.88,40.77 31.33,42.99
  pour Bottom (isolate 0.02, rank 2, no thermals): 27.5,45.84 32.4,45.84 32.4,39.5 27.5,39.5
  pour Route15 (isolate 0.02, rank 2, no thermals): 27.5,45.84 32.4,45.84 32.4,39.5 27.5,39.5
  pour Top (isolate 0.02, rank 2, no thermals): 27.5,45.84 32.4,45.84 32.4,39.5 27.5,39.5
  pour Route15 (isolate 0.02, rank 2, no thermals): 27.5,45.84 32.4,45.84 32.4,39.5 27.5,39.5
  pour Route2 (isolate 0.02, rank 2, no thermals): 27.5,45.84 32.4,45.84 32.4,39.5 27.5,39.5
GND36  (via drill 0.2)
  other vias: 40.04,41.73 40.95,40.1 38.81,40.92 42.03,41.72 40.45,42.98 39.81,42.98 42.35,40.55 41.95,40.1 42,42.35 41.63,42.99 38.96,42.57 39.26,42.95 42.93,42.89 40.45,40.5 39.7,39.95 42.88,40.77 42.33,42.99
  pour Bottom (isolate 0.02, rank 2, no thermals): 38.5,45.84 43.4,45.84 43.4,39.5 38.5,39.5
  pour Route15 (isolate 0.02, rank 2, no thermals): 38.5,45.84 43.4,45.84 43.4,39.5 38.5,39.5
  pour Top (isolate 0.02, rank 2, no thermals): 38.5,45.84 43.4,45.84 43.4,39.5 38.5,39.5
  pour Route15 (isolate 0.02, rank 2, no thermals): 38.5,45.84 43.4,45.84 43.4,39.5 38.5,39.5
  pour Route2 (isolate 0.02, rank 2, no thermals): 38.5,45.84 43.4,45.84 43.4,39.5 38.5,39.5
N$1
  Bottom 0.37: L2.2 18.78,9.01 18.49,9.3 17.7,9.3 arc90 17.3,8.9 17.3,7.61 arc-90 R1.2 arc90 17.05,7.36 J4.1
N$2
  cutout Top: 19.2,7.28 17.54,7.28 17.54,8.3 18.85,8.3 19.2,7.59
N$3
  Bottom 0.37: L3.2 29.78,9.01 29.49,9.3 28.7,9.3 arc90 28.3,8.9 28.3,7.61 arc-90 R2.2 arc90 28.05,7.36 J6.1
N$4
  cutout Top: 30.2,7.28 28.54,7.28 28.54,8.3 29.85,8.3 30.2,7.59
N$5
  Bottom 0.37: L4.2 40.78,9.01 40.49,9.3 39.7,9.3 arc90 39.3,8.9 39.3,7.61 arc-90 R4.2 arc90 39.05,7.36 J8.1
N$6
  cutout Top: 41.2,7.28 39.54,7.28 39.54,8.3 40.85,8.3 41.2,7.59
N$7
  Bottom 0.37: L5.2 7.78,20.01 7.49,20.3 6.7,20.3 arc90 6.3,19.9 6.3,18.61 arc-90 R5.2 arc90 6.05,18.36 J10.1
N$8
  cutout Top: 8.2,18.28 6.54,18.28 6.54,19.3 7.85,19.3 8.2,18.59
N$9
  Bottom 0.37: L6.2 18.78,20.01 18.49,20.3 17.7,20.3 arc90 17.3,19.9 17.3,18.61 arc-90 R6.2 arc90 17.05,18.36 J12.1
N$10
  cutout Top: 19.2,18.28 17.54,18.28 17.54,19.3 18.85,19.3 19.2,18.59
N$11
  Bottom 0.37: L7.2 29.78,20.01 29.49,20.3 28.7,20.3 arc90 28.3,19.9 28.3,18.61 arc-90 R7.2 arc90 28.05,18.36 J14.1
N$12
  cutout Top: 30.2,18.28 28.54,18.28 28.54,19.3 29.85,19.3 30.2,18.59
N$13
  Bottom 0.37: L8.2 40.78,20.01 40.49,20.3 39.7,20.3 arc90 39.3,19.9 39.3,18.61 arc-90 R8.2 arc90 39.05,18.36 J16.1
N$14
  cutout Top: 41.2,18.28 39.54,18.28 39.54,19.3 40.85,19.3 41.2,18.59
N$15
  Bottom 0.37: L9.2 7.78,31.01 7.49,31.3 6.7,31.3 arc90 6.3,30.9 6.3,29.61 arc-90 R9.2 arc90 6.05,29.36 J18.1
N$16
  cutout Top: 8.2,29.28 6.54,29.28 6.54,30.3 7.85,30.3 8.2,29.59
N$17
  Bottom 0.37: L10.2 18.78,31.01 18.49,31.3 17.7,31.3 arc90 17.3,30.9 17.3,29.61 arc-90 R10.2 arc90 17.05,29.36 J20.1
N$18
  cutout Top: 19.2,29.28 17.54,29.28 17.54,30.3 18.85,30.3 19.2,29.59
N$19
  Bottom 0.37: L11.2 29.78,31.01 29.49,31.3 28.7,31.3 arc90 28.3,30.9 28.3,29.61 arc-90 R11.2 arc90 28.05,29.36 J22.1
N$20
  cutout Top: 30.2,29.28 28.54,29.28 28.54,30.3 29.85,30.3 30.2,29.59
N$21
  Bottom 0.37: L12.2 40.78,31.01 40.49,31.3 39.7,31.3 arc90 39.3,30.9 39.3,29.61 arc-90 R12.2 arc90 39.05,29.36 J24.1
N$22
  cutout Top: 41.2,29.28 39.54,29.28 39.54,30.3 40.85,30.3 41.2,29.59
N$23
  Bottom 0.37: L13.2 7.78,42.01 7.49,42.3 6.7,42.3 arc90 6.3,41.9 6.3,40.61 arc-90 R13.2 arc90 6.05,40.36 J26.1
N$24
  cutout Top: 8.2,40.28 6.54,40.28 6.54,41.3 7.85,41.3 8.2,40.59
N$25
  Bottom 0.37: L14.2 18.78,42.01 18.49,42.3 17.7,42.3 arc90 17.3,41.9 17.3,40.61 arc-90 R14.2 arc90 17.05,40.36 J28.1
N$26
  cutout Top: 19.2,40.28 17.54,40.28 17.54,41.3 18.85,41.3 19.2,40.59
N$27
  Bottom 0.37: L15.2 29.78,42.01 29.49,42.3 28.7,42.3 arc90 28.3,41.9 28.3,40.61 arc-90 R15.2 arc90 28.05,40.36 J30.1
N$28
  cutout Top: 30.2,40.28 28.54,40.28 28.54,41.3 29.85,41.3 30.2,40.59
N$29
  Bottom 0.37: L16.2 40.78,42.01 40.49,42.3 39.7,42.3 arc90 39.3,41.9 39.3,40.61 arc-90 R16.2 arc90 39.05,40.36 J32.1
N$30
  cutout Top: 41.2,40.28 39.54,40.28 39.54,41.3 40.85,41.3 41.2,40.59
N$48
  Bottom 0.37: L1.2 7.78,9.01 7.49,9.3 6.7,9.3 arc90 6.3,8.9 6.3,7.61 arc-90 R3.2 arc90 6.05,7.36 J2.1
N$49
  cutout Top: 8.2,7.28 6.54,7.28 6.54,8.3 7.85,8.3 8.2,7.59
(copper drawn outside any net)
  shapes: Bottom area x7, Route15 area x7, Route2 area x7, Top area x7

## Text on the board
tPlace: r1.2 | r1.2 | r1.2 | r1.2 | r1.2 | r1.2 | r1.2 | r1.2 | r1.2 | r1.2 | r1.2 | r1.2 | r1.2 | r1.2 | r1.2 | r1.2